# Altium PCB f1_bd_3.PcbDoc
Units mil, origin at the board's own origin, x right, y up, seen from the top; angles counter-clockwise.
Board outline 900 x 1180 mil, 2 copper layers (Top Layer, Bottom Layer); 29 components, 48 nets, 153 pads, 8 vias.
Unrouted connection lines stored in the file: 68.
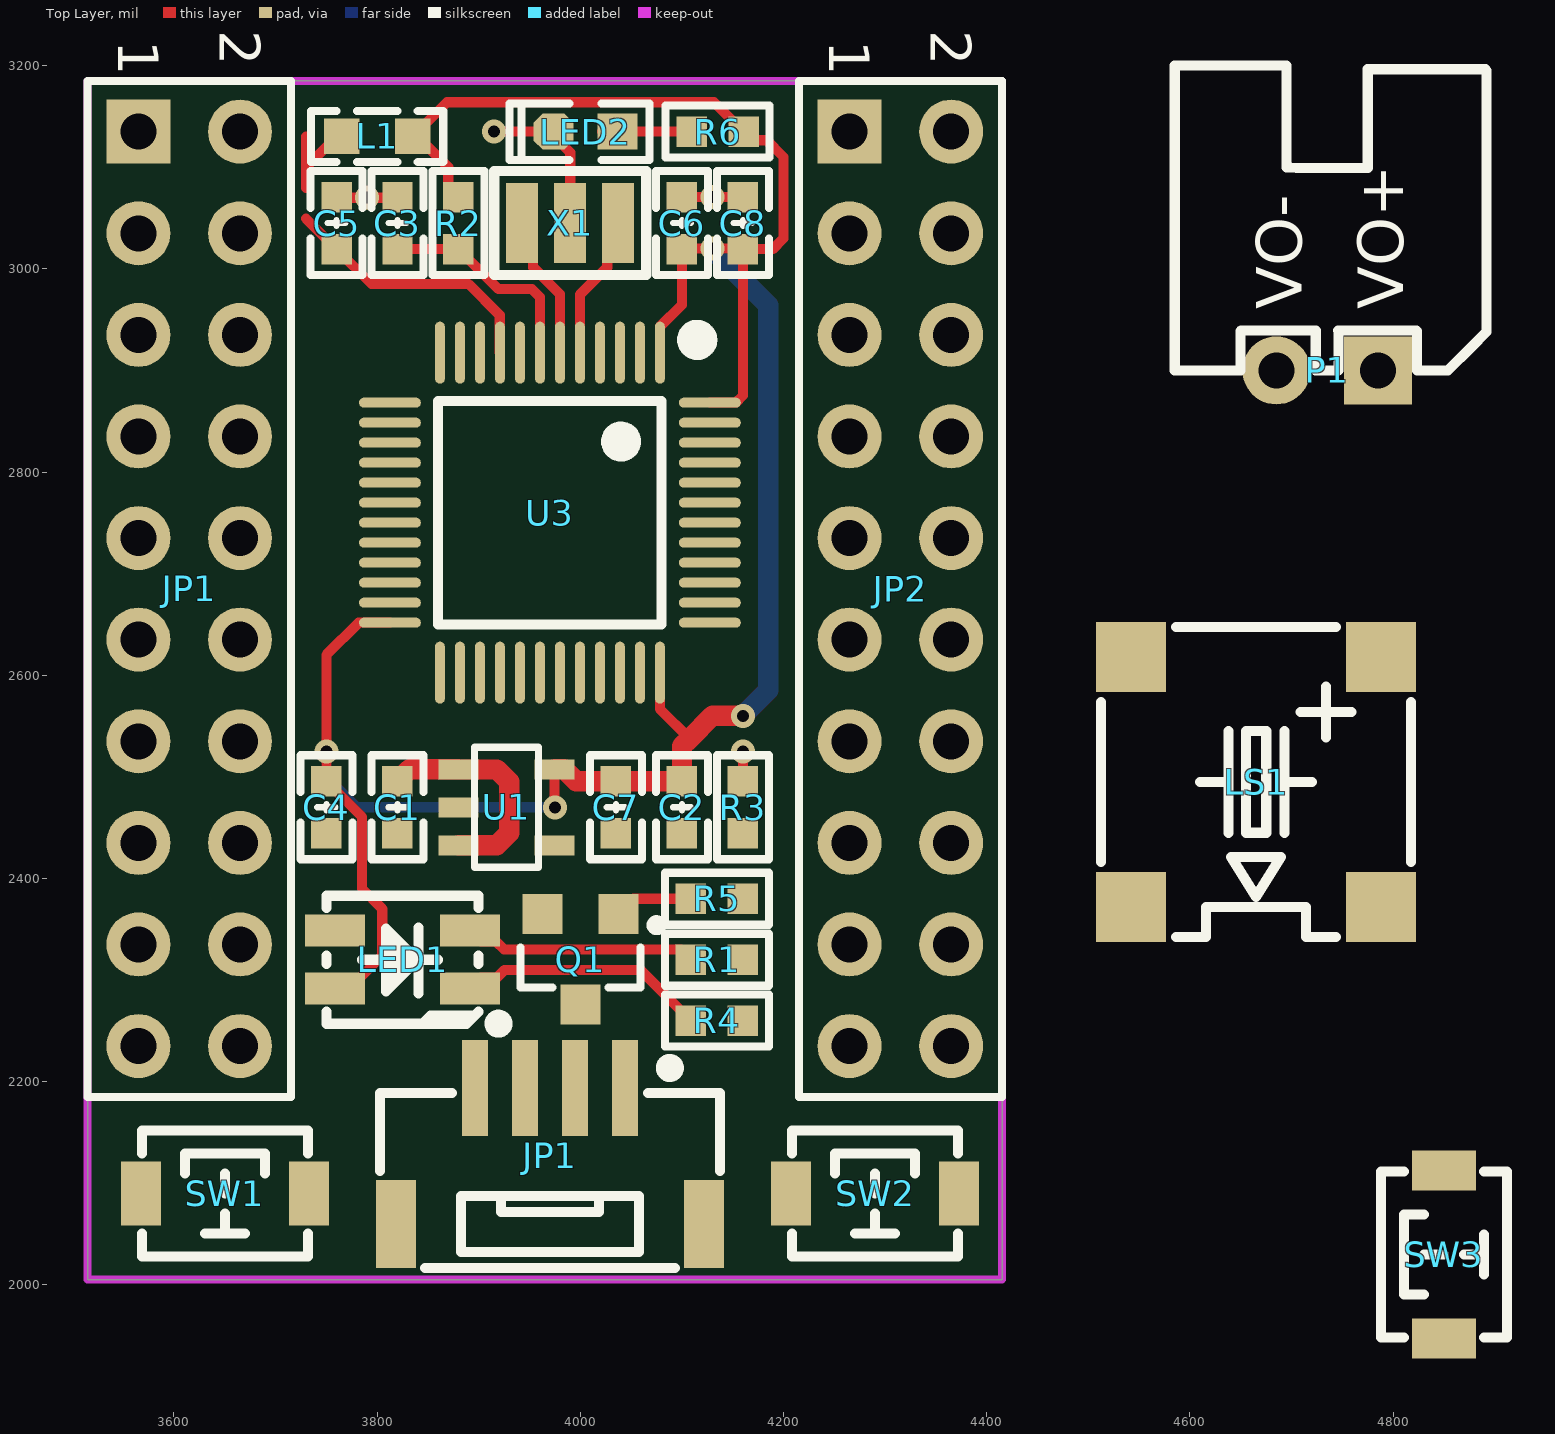
[diagram p0: Top Layer view]
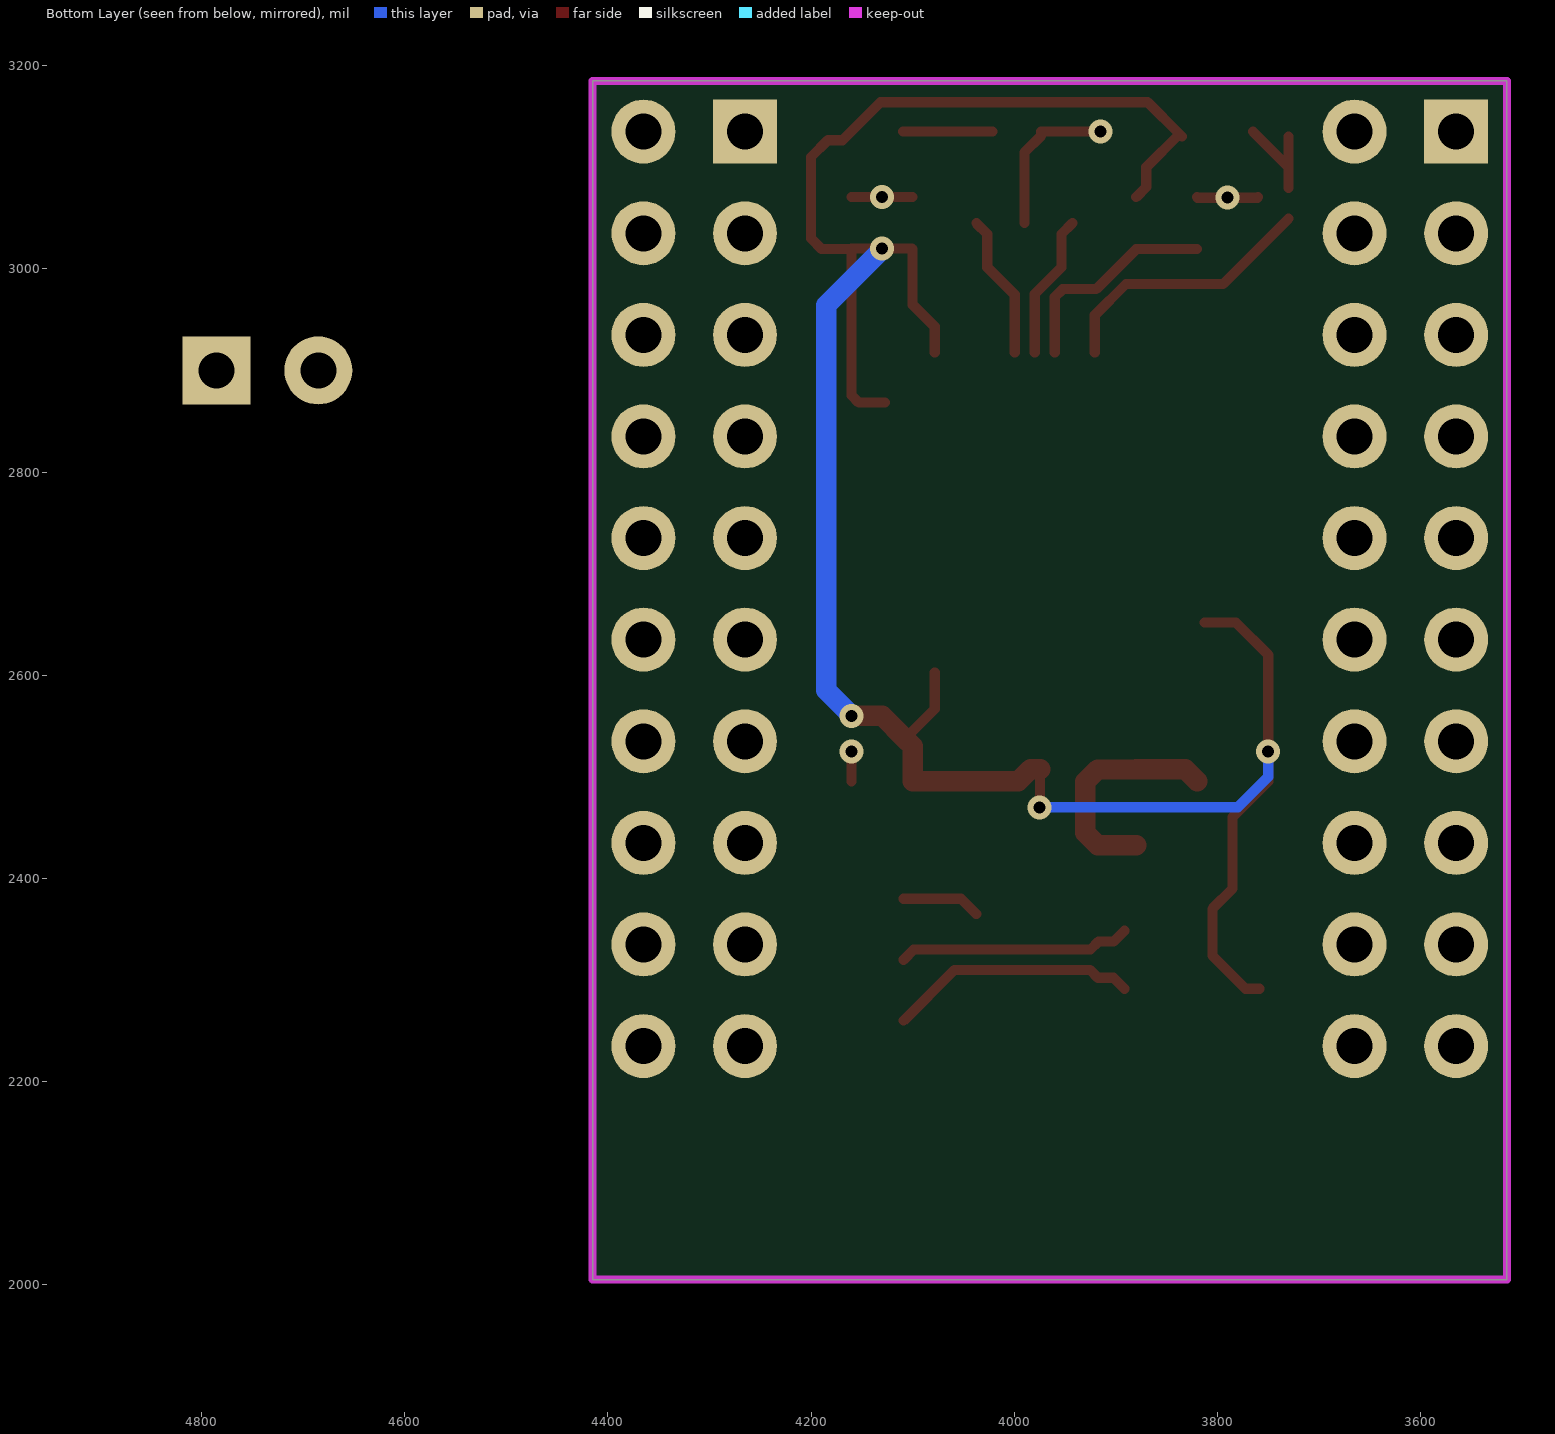
[diagram p1: Bottom Layer view, seen from below]

## Layer stack, top to bottom
Top Solder: solder mask 0.4, Solder Resist, Dk 3.5
Top Layer: signal copper 1.4
Dielectric 1: dielectric 12.6, FR-4, Dk 4.8
Bottom Layer: signal copper 1.4
Bottom Solder: solder mask 0.4, Solder Resist, Dk 3.5

## Board outline
3515,2005 3515,3185 4415,3185 4415,2005

## Design rules (kind name [scope] priority, off if disabled: settings)
Clearance [All] p1: gap=6 ignorepadtopadclearanceinfootprint=TRUE
PolygonConnect [All] p1: connectstyle=Relief reliefconductorwidth=10 reliefentries=4 polygonreliefangle="90 Angle" airgapwidth=10
RoutingVias [All] p1: holewidth=28 width=50 viastyle="Through Hole" minholewidth=28 minwidth=50 maxholewidth=28 maxwidth=50
SolderMaskExpansion [All] p1: expansion=4 istentingtop=FALSE
SupplyNets "Schematic Supply Nets_3" [InNet('5V')] p1: voltage=0.000
SupplyNets "Schematic Supply Nets_2" [InNet('3V3VDDA')] p2: voltage=0.000
SupplyNets "Schematic Supply Nets_1" [InNet('VSS')] p3: voltage=0.000
SupplyNets "Schematic Supply Nets" [InNet('3V3')] p4: voltage=0.000
Width [All] p1: maxlimit=20 minlimit=10 preferedwidth=20 minimp=50.000000 maximp=50.000000 favimp=50.000000
30 further rules are at their usual default settings.

## Components (designator, comment, footprint, x,y, rotation, side; value= is the part's Value field where it differs from the comment)
C1 "1uF" "C 0603_L" 3820,2470 r270 top
C2 "100nF" "C 0603_L" 4100,2470 r270 top
C3 "100nF/50V" "C 0603_L" 3820,3045 r90 top
C4 "100nF/50V" "C 0603_L" 3750,2470 r90 top
C5 "100nF/50V" "C 0603_L" 3760,3045 r270 top
C6 "100nF/50V" "C 0603_L" 4100,3045 r270 top
C7 "100nF/50V" "C 0603_L" 4035,2470 r90 top
C8 "100nF/50V" "C 0603_L" 4160,3045 r270 top
JP1 "Header 2X10" HDR2.54-LI-2x10P 3615,2685 r270 top
JP1 "HDR-1X4" "GH 1.25-LS-4P" 3970,2115 r180 top
JP2 "Header 2X10" HDR2.54-LI-2x10P 4315,2685 r270 top
L1 "0Ω" "L 0603" 3800,3130.3 r0 top
LED1 "RGB" "LED 3528-RGB" 3825,2320 r180 top
LED2 "Colour" "LED 0603R" 4005,3135 r180 top
LS1 "MLT-7525" BUZZER_7525_S 4665,2495 r0 top
P1 "port_mot_2p" XH2.54_2P 4730,3025 r0 top
Q1 "SS8050" SOT23-3L 4000,2320 r180 top
R1 "1K" "R 0603_L" 4134.41,2320 r180 top
R2 "10k" "R 0603_L" 3880,3045 r90 top
R3 "10k" "R 0603_L" 4160,2470 r270 top
R4 "1K" "R 0603_L" 4134.41,2260 r180 top
R5 "1K" "R 0603_L" 4134.41,2380 r180 top
R6 "1K" "R 0603_L" 4135,3135 r0 top
SW1 "3.2x4.2x2.5" "TSW SMD-3*4*2" 3650,2090 r0 top
SW2 "3.2x4.2x2.5" "TSW SMD-3*4*2" 4290,2090 r0 top
SW3 "3.2x4.2x2.5" "TSW SMD-3*4*2" 4850,2030 r90 top
U1 "RT9013-33GB" SOT23-5 3880,2507.4 r270 top
U3 "STM32F103C8T6" "LQFP48 7X7_L" 3970,2760 r180 top
X1 "8M" "OSC 3213-3P" 3990,3045 r0 top

## Footprints (in the part's own frame and the unit in brackets; to place one, negate y for a bottom-side part, rotate by r counter-clockwise, add the part's x,y. Pads: shape width x height; smd on the part's side, far side on the other; paste and mask are expansions set on the pad)
BUZZER_7525_S [mm] "8.5x8.5x3mm(长宽高)"
  rect 1.75x1.75 smd: 1(3.125,3.125) 2(-3.125,3.125) 3(-3.125,-3.125) 4(3.125,-3.125)
  silkscreen extent -3.88,-3.88 3.88,3.88, body extent -3.75,-3.75 3.75,3.75, height 2.5
"C 0603_L" [mil] "无极性贴片电容"
  rect 30x30 smd: 1(-25.59,0) 2(25.59,0)
  silkscreen extent -51,-26 51,26, body extent -31,-16 31,16, height 32
"GH 1.25-LS-4P" [mm] "长：8.25mm，宽：4.95mm，高：4.1mm"
  rect 1x2.2 smd: 0(-3.85,1.4) 100(3.85,1.4)
  rect 0.65x2.4 smd: 1(-1.875,-2) 2(-0.625,-2) 3(0.625,-2) 4(1.875,-2)
  silkscreen extent -4.25,-2.6 4.25,2.5, body extent -4.13,-2.45 4.12,2.5, height 4.2
HDR2.54-LI-2x10P [mm] "双排排针，10x2脚"
  rect 1.6x1.6 hole 0.9: 1(-11.43,-1.27)
  round 1.6 hole 0.9: 2(-11.43,1.27) 3(-8.89,-1.27) 4(-8.89,1.27) 5(-6.35,-1.27) 6(-6.35,1.27) 7(-3.81,-1.27) 8(-3.81,1.27) 9(-1.27,-1.27) 10(-1.27,1.27) 11(1.27,-1.27) 12(1.27,1.27) 13(3.81,-1.27) 14(3.81,1.27) 15(6.35,-1.27) 16(6.35,1.27) 17(8.89,-1.27) 18(8.89,1.27) 19(11.43,-1.27) 20(11.43,1.27)
  silkscreen extent -12.7,-2.54 12.7,2.54, body extent -12.7,-2.54 12.7,2.54, height 8.5
"L 0603" [mil] "小功率贴片电感"
  rect 35x35 smd: 1(-35,0) 2(35,0)
  silkscreen extent -65,-25 65,25, body extent -31,-16 31,16, height 31
"LED 0603R" [mm] "红色0603LED"
  rect 1x0.9 smd: 1(-0.8,0)
  oct 1x0.9 smd: 2(0.8,0)
  silkscreen extent -1.6,-0.7 1.9,0.7, body extent -0.8,-0.4 0.8,0.4, height 0.47
"LED 3528-RGB" [mm] "4脚，3528LED"
  rect 1.5x0.8 smd: 1(1.689,0.725) 2(1.689,-0.725) 3(-1.689,-0.725) 4(-1.689,0.725)
  silkscreen extent -2.5,-1.6 1.9,1.7, body extent -1.75,-1.4 1.75,1.4, height 1.9
"LQFP48 7X7_L" [mm] "48脚，体宽7x7mm，脚距0.5mm"
  oval 0.25x1.55 smd: 1(-2.75,-4) 2(-2.25,-4) 3(-1.75,-4) 4(-1.25,-4) 5(-0.75,-4) 6(-0.25,-4) 7(0.25,-4) 8(0.75,-4) 9(1.25,-4) 10(1.75,-4) 11(2.25,-4) 12(2.75,-4) 25(2.75,4) 26(2.25,4) 27(1.75,4) 28(1.25,4) 29(0.75,4) 30(0.25,4) 31(-0.25,4) 32(-0.75,4) 33(-1.25,4) 34(-1.75,4) 35(-2.25,4) 36(-2.75,4)
  oval 1.55x0.25 smd: 13(4,-2.75) 14(4,-2.25) 15(4,-1.75) 16(4,-1.25) 17(4,-0.75) 18(4,-0.25) 19(4,0.25) 20(4,0.75) 21(4,1.25) 22(4,1.75) 23(4,2.25) 24(4,2.75) 37(-4,2.75) 38(-4,2.25) 39(-4,1.75) 40(-4,1.25) 41(-4,0.75) 42(-4,0.25) 43(-4,-0.25) 44(-4,-0.75) 45(-4,-1.25) 46(-4,-1.75) 47(-4,-2.25) 48(-4,-2.75)
  silkscreen extent -3.93,-4.57 2.79,2.79, body extent -4.5,-4.5 4.5,4.5, height 1.45
"OSC 3213-3P" [mm] "内置电容晶振"
  rect 0.8x2 smd: 1(-1.2,0) 2(1.2,0) 3(0,0)
  silkscreen extent -1.9,-1.3 1.9,1.3, body extent -1.6,-0.65 1.6,0.65, height 1.02
"R 0603_L" [mil] "1/10W贴片电阻"
  rect 30x30 smd: 1(-25.59,0) 2(25.59,0)
  silkscreen extent -51,-26 51,26, body extent -31,-16 32,16, height 16
SOT23-3L [mm] "3x1.3x1mm(长宽高)"
  rect 1x1 smd: 1(-0.95,-1.143) 2(0.95,-1.143) 3(0,1.125)
  silkscreen extent -2.03,-0.99 1.5,0.7, body extent -1.5,-1.2 1.5,1.2, height 1.05
SOT23-5 [mm]
  rect 0.5x1 smd: 1(0,0) 2(0.95,0) 3(1.9,0) 4(1.9,2.4) 5(0,2.4)
  silkscreen extent -0.55,0.4 2.45,2, body extent -0.5,-0.2 2.4,2.6, height 1.09
"TSW SMD-3*4*2" [mm] "3*4*2mm"
  rect 1x1.6 smd: 1(-2.1,0) 2(2.1,0)
  silkscreen extent -2.08,-1.58 2.08,1.58, body extent -2.45,-1.45 2.45,1.45, height 2
XH2.54_2P [mm]
  rect 1.7x1.7 hole 0.9: 1(1.397,-3.175)
  round 1.7 hole 0.9: 2(-1.143,-3.175)
  silkscreen extent -3.68,-3.17 4.11,4.44, body extent -3.64,-3.52 3.9,4.17, height 5.73

## Part data
C1 C2: library part C, "无极性贴片电容", BOM名称=无极性贴片电容, 学习资源=www.ooocke.com, 版权归属=源创客
C3 C4 C5 C6 C7 C8: library part 无极贴片电容, "贴片电容"
JP1 JP2: library part "Header 10X2", "10*2P接插件", BOM名称=10*2P接插件, 学习资源=www.ooocke.com, 版权归属=源创客
JP1: library part "Header 4", "4P接插件", BOM名称=4P接插件, 学习资源=www.ooocke.com, 版权归属=源创客
L1: library part 磁珠, "小功率贴片电感"
LED1: library part LED-RGB-A, "共阳三基色LED", BOM名称=三基色LED, 学习资源=www.ooocke.com, 版权归属=源创客
LED2: library part LED-SMD, "贴片LED", BOM名称=贴片LED, 学习资源=www.ooocke.com, 版权归属=源创客
LS1: library part Buzzer, "蜂鸣器", BOM名称=蜂鸣器, 学习资源=www.ooocke.com, 版权归属=源创客
P1: "开环直流电机接口 / XH2.54弯排针2p"
Q1: library part 8050-SMD, "高频放大-NPN型", BOM名称=高频放大-NPN型, 学习资源=www.ooocke.com, 属性="40V 1.5A 1W 100MHZ", 版权归属=源创客
R1 R4 R5 R6: library part R, "贴片电阻", BOM名称=贴片电阻, 学习资源=www.ooocke.com, 版权归属=源创客
R2 R3: library part 电阻, "贴片电阻1%精度"
SW1 SW2 SW3: library part "TSW SMD-3x4_D", "3.2x4.2轻触开关", BOM名称=3x6轻触开关, 学习资源=www.ooocke.com, 版权归属=源创客
U1: library part RT9193-33GB
U3: "STM32F103C8T6是一款由意法半导体公司（ST）推出的基于Cortex-M3内核的32位微控制器，硬件采用LQFP48封装，属于ST公司微控制器中的STM32系列。"
X1: library part XTAL-3P, "3脚内置电容无源晶振"

## Via types
v1: diameter 23.62, hole 11.81, Top Layer to Bottom Layer, 8 vias

## Nets (pads, with @x,y where several pads share a name; then routed paths per layer and width w, separated by ;. In a path a pad name is that pad's centre, name@x,y a point inside that pad or via, vN(x,y) a via of type N, cw(c..) or ccw(c..) an arc to the next point about the centre after c; other vN are vias at no path point)
3V3: C2.1 C4.2 C6.2 C7.2 C8.2 JP1.2@3665,3135 JP1.4@3896.18,2193.74 JP2.20 L1.2 LED1.1 R2.2 R6.2 U1.5 U3.1 U3.24 U3.36 U3.48 | length 2518.1
  Top Layer w10: LED1.1 3772.28,2291.46 3805,2324.18 3805,2370 3785,2390 3785,2460.59 C4.2 v1(3750,2525) 3750,2620 3781.73,2651.73 U3.24 ; L1.2 L1.2@3837.35,3132.65 ; R2.2 3870,3080.59 3870,3100 L1.2@3837.35,3132.65 ; U1.5 3974.49,2470.51 v1(3975,2470) ; U3.36 4078.27,2566.73 4107.5,2537.5 ; U3.1 4078.27,2942.9 4100,2964.63 C6.2 4100.58,3020 v1(4130,3020) C8.2@4160,3020 ; U3.48 4152.9,2868.27 4160,2875.37 C8.2 4189.41,3019.41 4200,3030 4200,3110 4183.4,3126.6 4168.99,3126.6 R6.2 4131.58,3164 3868.7,3164 L1.2@3837.35,3132.65
  Top Layer w20: U1.5 3984.02,2507.4 3995.83,2495.59 C7.2 C2.1 4100,2530 4107.5,2537.5 4130,2560 v1(4160,2560)
  Bottom Layer w10: v1(3750,2525) 3750,2500 3780,2470 v1(3975,2470)
  Bottom Layer w20: v1(4130,3020) 4130,3019.02 4185,2964.02 4185,2585 v1(4160,2560)
3V3VDDA: C5.2 L1.1 U3.9 | length 367.1
  Top Layer w10: 3730,3049.41 C5.2 3794.41,2985 3890,2985 3920.71,2954.29 3920.71,2917.54 U3.9 ; 3730,3079.41 3730,3130 ; 3730,3100 L1.1@3765,3135
5V: C1.1 JP2.1 LS1.1 P1.1 U1.1 U1.3 | length 225.2
  Top Layer w20: C1.1 3831.8,2507.4 U1.1 3880.16,2507.24 3917.76,2507.24 3930,2495 3930,2445 3917.76,2432.76 3880.16,2432.76 U1.3
BOOT0: JP2.15 R3.1 U3.44 | length 29.4
  Top Layer w10: R3.1 v1(4160,2525)
NetLED1_3: LED1.3 R1.2 | length 229.1
  Top Layer w10: LED1.3 3902.25,2337.8 3917.2,2337.8 3925,2330 4098.82,2330 R1.2
NetLED1_4: LED1.4 R4.2 | length 245.7
  Top Layer w10: LED1.4 3902.25,2302.2 3917.7,2302.2 3925.49,2310 4058.82,2310 R4.2
NetLED2_1: LED2.1 R6.1 | length 87.9
  Top Layer w10: LED2.1@4021.5,3135 R6.1
NetLS1_2: LS1.2 Q1.3
NetQ1_1: Q1.1 R5.2 | length 77.6
  Top Layer w10: Q1.1 4052.4,2380 R5.2
NRST: C3.1 JP1.12 R2.1 U3.7 | length 214.5
  Top Layer w10: C3.1 R2.1 3919.41,2980 3952.37,2980 3960.16,2972.22 U3.7
OSC_IN: U3.5 X1.2 | length 143.2
  Top Layer w10: U3.5 3999.53,2974.53 4026.5,3001.5 4026.5,3034.25 X1.2
OSC_OUT: U3.6 X1.1 | length 142.9
  Top Layer w10: X1.1 3953.51,3034.25 3953.51,3001.49 3979.84,2975.16 U3.6
PA0: JP1.20 U3.10
PA1: JP1.19 U3.11
PA2: JP1.18 U3.12
PA3: JP1.17 U3.13
PA4: JP1.16 U3.14
PA5: JP1.15 U3.15
PA6: JP1.14 U3.16
PA7: JP1.13 U3.17
PA8: JP2.3 U3.29
PA9: JP2.4 U3.30
PA10: JP2.5 U3.31
PA11: U3.32
PA12: JP2.7 U3.33
PA13: JP1.2@3994.61,2193.74 JP2.8 U3.34
PA14: JP1.1@4043.82,2193.74 JP2.9 U3.37
PA15: U3.38
PB0: JP1.11 U3.18
PB1: JP1.9 U3.19
PB2: JP1.10 U3.20
PB3: JP2.12 U3.39
PB4: JP2.11 U3.40
PB5: U3.41
PB6: JP2.13 R5.1 U3.42
PB7: JP2.16 U3.43
PB8: U3.45
PB9: JP2.17 U3.46
PB10: JP1.7 U3.21
PB11: JP1.8 U3.22
PB12: JP1.5 U3.25
PB13: JP1.6 U3.26
PB14: JP1.3@3565,3035 SW2.2 U3.27
PB15: JP1.4@3665,3035 SW1.2 U3.28
PC13: JP2.19 SW3.2 U3.2
PC14: R4.1 U3.3
PC15: R1.1 U3.4
VSS: C1.2 C2.2 C3.2 C4.1 C5.1 C6.1 C7.1 C8.1 JP1.0 JP1.1@3565,3135 JP1.3@3945.39,2193.74 JP1.100 JP2.2 LED2.2 P1.2 Q1.2 R3.2 SW1.1 SW2.1 SW3.1 U1.2 U3.8 U3.23 U3.35 U3.47 X1.3 | length 275.8
  Top Layer w10: C5.1 3760.59,3070 v1(3790,3070) 3819.42,3070 C3.2 ; v1(3915,3135) LED2.2 3973.5,3131.04 3990,3114.54 X1.3 ; C6.1 C8.1
  other v1: 4130,3070.59
pads on no net: JP2.6 JP2.10 JP2.14 JP2.18 LED1.2 LS1.3 LS1.4 U1.4

## Keep-outs
Keep-Out Layer:
  the board outline again, w7.87

## Text inside footprints (layer, text, board x,y; h text height)
JP1: Top Overlay "2" at 3645,3235 h40 r270; Top Overlay "1" at 3545,3225 h40 r270
JP2: Top Overlay "2" at 4345,3235 h40 r270; Top Overlay "1" at 4245,3225 h40 r270
P1: Top Overlay "VO-" at 4710,2960 h45 r90; Top Overlay "VO+" at 4810,2960 h45 r90